# EAGLE board QwiicHUD_panel (EAGLE 7.7.0)
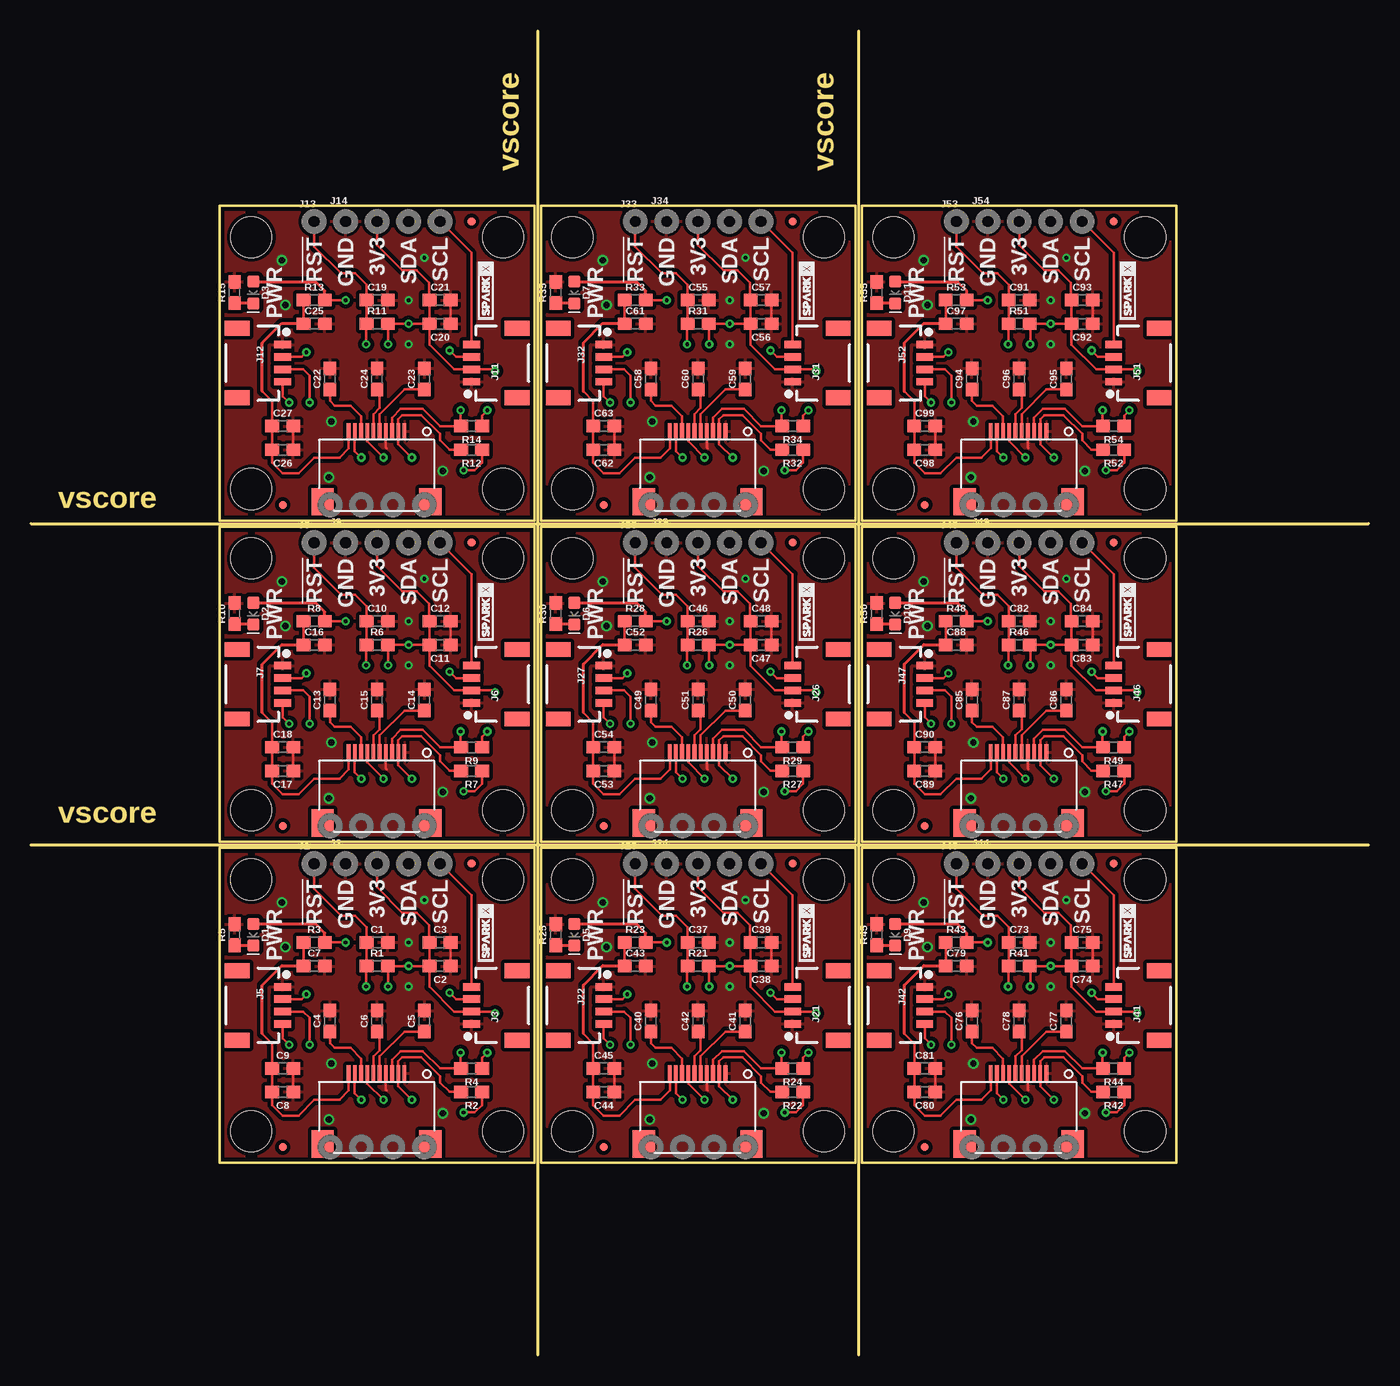
[diagram p0: board, top side]
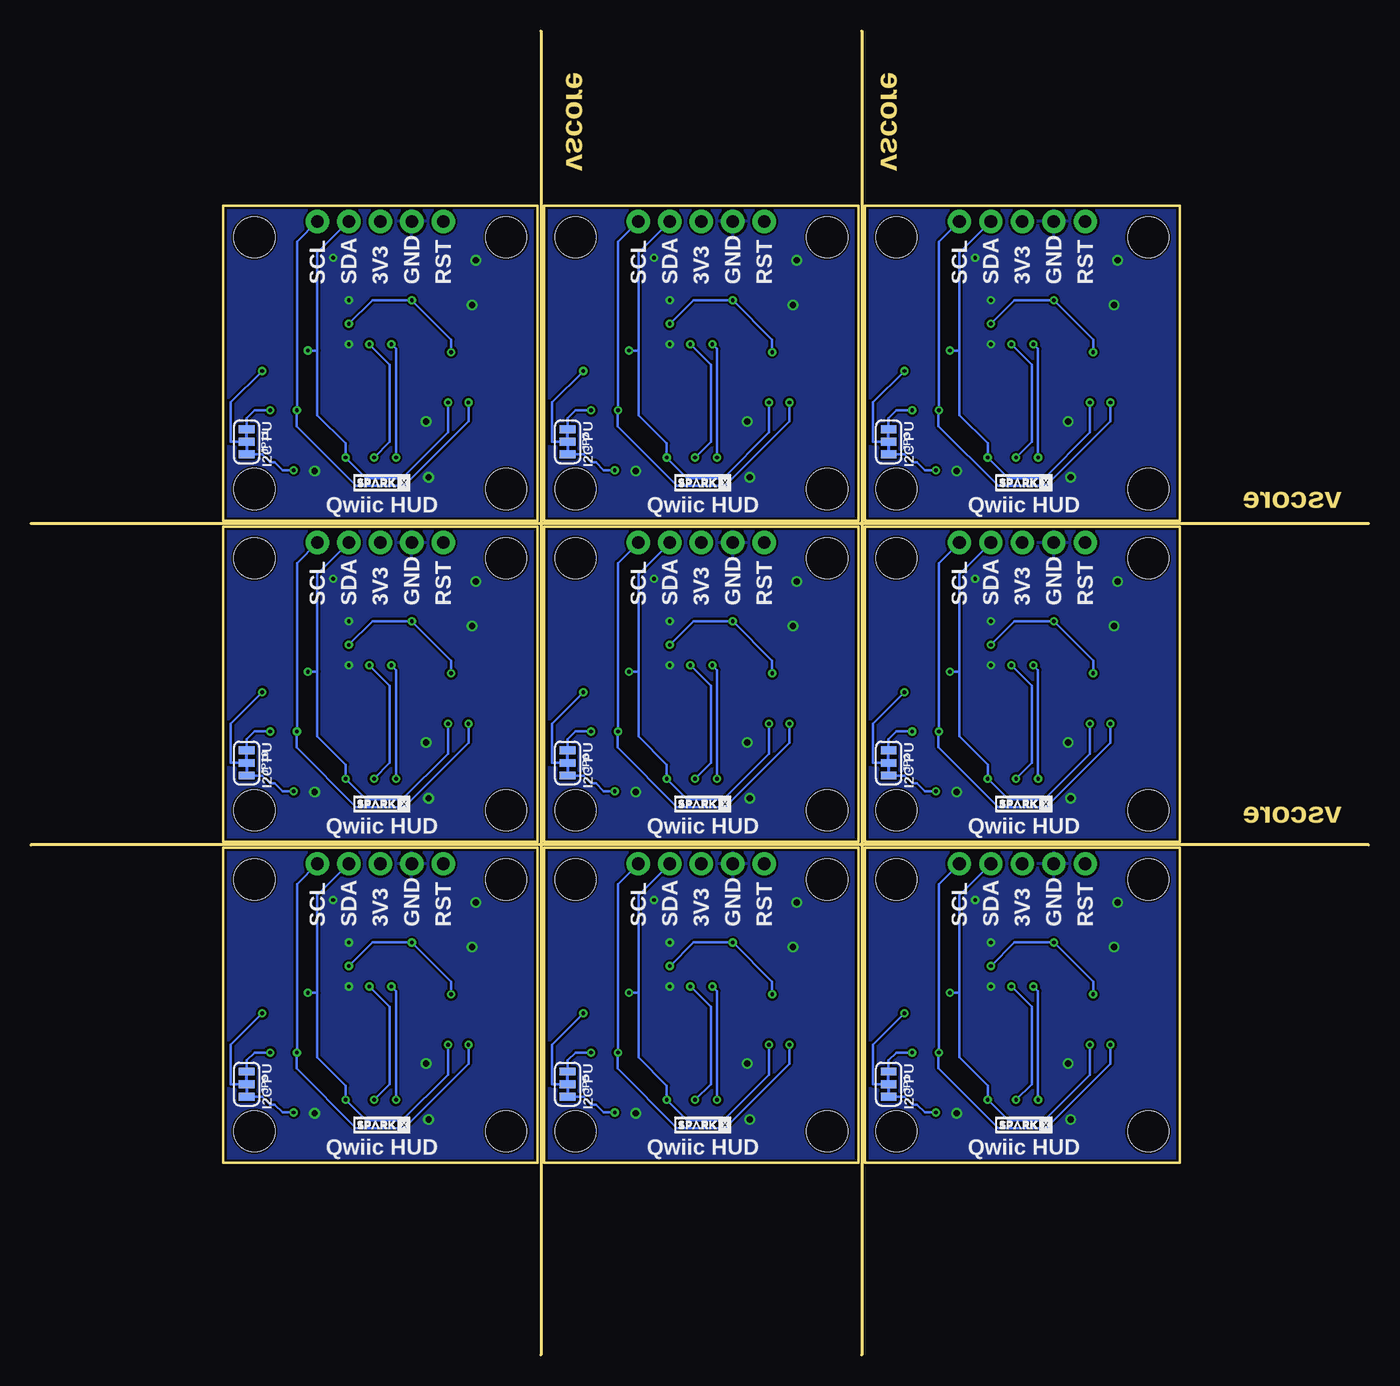
[diagram p1: board, bottom side, seen from below]

Size 107.95 x 106.81 mm. Coordinates in mm from the lower left corner, seen from the top.
Outline: 40.89,106.81 40.89,0
Outline: 66.8,106.81 66.8,0
Outline: 0,67.06 107.95,67.06
Outline: 0,41.15 107.95,41.15
Outline: 15.24,40.89 40.64,40.89 40.64,15.49 15.24,15.49 15.24,40.89
Outline: 15.24,66.8 40.64,66.8 40.64,41.4 15.24,41.4 15.24,66.8
Outline: 15.24,92.71 40.64,92.71 40.64,67.31 15.24,67.31 15.24,92.71
Outline: 41.15,40.89 66.55,40.89 66.55,15.49 41.15,15.49 41.15,40.89
Outline: 41.15,66.8 66.55,66.8 66.55,41.4 41.15,41.4 41.15,66.8
Outline: 41.15,92.71 66.55,92.71 66.55,67.31 41.15,67.31 41.15,92.71
Outline: 67.06,40.89 92.46,40.89 92.46,15.49 67.06,15.49 67.06,40.89
Outline: 67.06,66.8 92.46,66.8 92.46,41.4 67.06,41.4 67.06,66.8
Outline: 67.06,92.71 92.46,92.71 92.46,67.31 67.06,67.31 67.06,92.71
Copper layers (1*16): Top 0.035mm / dielectric 1.5mm / Bottom 0.035mm
Design rules "SparkFun-2-layer-TIGHT": minimum track width 7mil, minimum drill 15mil, track to track 7mil, track to pad 7mil, pad to pad 7mil, via to via 7mil, smd to smd 7mil, copper to edge 7mil, drill to drill 7mil, minimum pad ring 7mil, minimum via ring 7mil, stop-mask expansion 4mil, vias tented up to drill 25mil, thermal gap 10mil

## Footprints (pad centres in the part's own frame; a part is rotated, then mirrored left to right if it is on the bottom)
0603 = smd 1.1 x 1: 1 -0.85,0; 2 0.85,0
LED-0603 = smd 1 x 1: A -0.877,0; C 0.877,0
FIDUCIAL-MICRO = smd 0.635 x 0.635: 1 0,0
1X01_NO_SILK = drill 1.016 pad 1.88: 1 0,0
1X04_NO_SILK = drill 1.016 pad 1.88: 1 0,0; 2 2.54,0; 3 5.08,0; 4 7.62,0
1X04_1MM_RA = smd 0.6 x 1.35: 1 -1.5,0; 2 -0.5,0; 3 0.5,0; 4 1.5,0 | smd 1.2 x 2: NC1 2.8,-3.675; NC2 -2.8,-3.675
SERIES6288 = smd 0.3 x 1.3: 1 -2.3,3.4; 2 -1.8,3.4; 3 -1.3,3.4; 4 -0.8,3.4; 5 -0.3,3.4; 6 0.2,3.4; 7 0.7,3.4; 8 1.2,3.4; 9 1.7,3.4; 10 2.2,3.4 | smd 1.8 x 2.2: NC1 -4.4,-2.3; NC2 4.3,-2.3
SMT-JUMPER_3_2-NC_TRACE_SILK = smd 0.635 x 1.27: 1 -1.016,0; 2 0,0; 3 1.016,0
QWIIC_BOARD_MOUNT_HOLES = hole 3.302: -10.16,10.16; 10.16,10.16; 10.16,-10.16; -10.16,-10.16

## Placement (x,y rotation side)
C1  2.2uF  [0603]  27.94,33.27 0 top
C2  4.7uF  [0603]  33.02,31.37 180 top
C3  0.1uF  [0603]  33.02,33.27 0 top
C4  1.0uF  [0603]  24.13,26.92 90 top
C5  1.0uF  [0603]  31.75,26.92 90 top
C6  1.0uF  [0603]  27.94,26.92 90 top
C7  2.2uF  [0603]  22.86,31.37 0 top
C8  4.7uF  [0603]  20.32,21.21 180 top
C9  0.1uF  [0603]  20.32,23.11 0 top
C10  2.2uF  [0603]  27.94,59.18 0 top
C11  4.7uF  [0603]  33.02,57.28 180 top
C12  0.1uF  [0603]  33.02,59.18 0 top
C13  1.0uF  [0603]  24.13,52.83 90 top
C14  1.0uF  [0603]  31.75,52.83 90 top
C15  1.0uF  [0603]  27.94,52.83 90 top
C16  2.2uF  [0603]  22.86,57.28 0 top
C17  4.7uF  [0603]  20.32,47.12 180 top
C18  0.1uF  [0603]  20.32,49.02 0 top
C19  2.2uF  [0603]  27.94,85.09 0 top
C20  4.7uF  [0603]  33.02,83.19 180 top
C21  0.1uF  [0603]  33.02,85.09 0 top
C22  1.0uF  [0603]  24.13,78.74 90 top
C23  1.0uF  [0603]  31.75,78.74 90 top
C24  1.0uF  [0603]  27.94,78.74 90 top
C25  2.2uF  [0603]  22.86,83.19 0 top
C26  4.7uF  [0603]  20.32,73.03 180 top
C27  0.1uF  [0603]  20.32,74.93 0 top
C37  2.2uF  [0603]  53.85,33.27 0 top
C38  4.7uF  [0603]  58.93,31.37 180 top
C39  0.1uF  [0603]  58.93,33.27 0 top
C40  1.0uF  [0603]  50.04,26.92 90 top
C41  1.0uF  [0603]  57.66,26.92 90 top
C42  1.0uF  [0603]  53.85,26.92 90 top
C43  2.2uF  [0603]  48.77,31.37 0 top
C44  4.7uF  [0603]  46.23,21.21 180 top
C45  0.1uF  [0603]  46.23,23.11 0 top
C46  2.2uF  [0603]  53.85,59.18 0 top
C47  4.7uF  [0603]  58.93,57.28 180 top
C48  0.1uF  [0603]  58.93,59.18 0 top
C49  1.0uF  [0603]  50.04,52.83 90 top
C50  1.0uF  [0603]  57.66,52.83 90 top
C51  1.0uF  [0603]  53.85,52.83 90 top
C52  2.2uF  [0603]  48.77,57.28 0 top
C53  4.7uF  [0603]  46.23,47.12 180 top
C54  0.1uF  [0603]  46.23,49.02 0 top
C55  2.2uF  [0603]  53.85,85.09 0 top
C56  4.7uF  [0603]  58.93,83.19 180 top
C57  0.1uF  [0603]  58.93,85.09 0 top
C58  1.0uF  [0603]  50.04,78.74 90 top
C59  1.0uF  [0603]  57.66,78.74 90 top
C60  1.0uF  [0603]  53.85,78.74 90 top
C61  2.2uF  [0603]  48.77,83.19 0 top
C62  4.7uF  [0603]  46.23,73.03 180 top
C63  0.1uF  [0603]  46.23,74.93 0 top
C73  2.2uF  [0603]  79.76,33.27 0 top
C74  4.7uF  [0603]  84.84,31.37 180 top
C75  0.1uF  [0603]  84.84,33.27 0 top
C76  1.0uF  [0603]  75.95,26.92 90 top
C77  1.0uF  [0603]  83.57,26.92 90 top
C78  1.0uF  [0603]  79.76,26.92 90 top
C79  2.2uF  [0603]  74.68,31.37 0 top
C80  4.7uF  [0603]  72.14,21.21 180 top
C81  0.1uF  [0603]  72.14,23.11 0 top
C82  2.2uF  [0603]  79.76,59.18 0 top
C83  4.7uF  [0603]  84.84,57.28 180 top
C84  0.1uF  [0603]  84.84,59.18 0 top
C85  1.0uF  [0603]  75.95,52.83 90 top
C86  1.0uF  [0603]  83.57,52.83 90 top
C87  1.0uF  [0603]  79.76,52.83 90 top
C88  2.2uF  [0603]  74.68,57.28 0 top
C89  4.7uF  [0603]  72.14,47.12 180 top
C90  0.1uF  [0603]  72.14,49.02 0 top
C91  2.2uF  [0603]  79.76,85.09 0 top
C92  4.7uF  [0603]  84.84,83.19 180 top
C93  0.1uF  [0603]  84.84,85.09 0 top
C94  1.0uF  [0603]  75.95,78.74 90 top
C95  1.0uF  [0603]  83.57,78.74 90 top
C96  1.0uF  [0603]  79.76,78.74 90 top
C97  2.2uF  [0603]  74.68,83.19 0 top
C98  4.7uF  [0603]  72.14,73.03 180 top
C99  0.1uF  [0603]  72.14,74.93 0 top
D1  RED  [LED-0603]  17.94,33.89 270 top
D2  RED  [LED-0603]  17.94,59.8 270 top
D3  RED  [LED-0603]  17.94,85.71 270 top
D5  RED  [LED-0603]  43.85,33.89 270 top
D6  RED  [LED-0603]  43.85,59.8 270 top
D7  RED  [LED-0603]  43.85,85.71 270 top
D9  RED  [LED-0603]  69.76,33.89 270 top
D10  RED  [LED-0603]  69.76,59.8 270 top
D11  RED  [LED-0603]  69.76,85.71 270 top
FD1  FIDUCIALUFIDUCIAL  [FIDUCIAL-MICRO]  20.32,16.76 0 top
FD2  FIDUCIALUFIDUCIAL  [FIDUCIAL-MICRO]  35.56,39.62 0 top
FD3  FIDUCIALUFIDUCIAL  [FIDUCIAL-MICRO]  20.32,42.67 0 top
FD4  FIDUCIALUFIDUCIAL  [FIDUCIAL-MICRO]  35.56,65.53 0 top
FD5  FIDUCIALUFIDUCIAL  [FIDUCIAL-MICRO]  20.32,68.58 0 top
FD6  FIDUCIALUFIDUCIAL  [FIDUCIAL-MICRO]  35.56,91.44 0 top
FD9  FIDUCIALUFIDUCIAL  [FIDUCIAL-MICRO]  46.23,16.76 0 top
FD10  FIDUCIALUFIDUCIAL  [FIDUCIAL-MICRO]  61.47,39.62 0 top
FD11  FIDUCIALUFIDUCIAL  [FIDUCIAL-MICRO]  46.23,42.67 0 top
FD12  FIDUCIALUFIDUCIAL  [FIDUCIAL-MICRO]  61.47,65.53 0 top
FD13  FIDUCIALUFIDUCIAL  [FIDUCIAL-MICRO]  46.23,68.58 0 top
FD14  FIDUCIALUFIDUCIAL  [FIDUCIAL-MICRO]  61.47,91.44 0 top
FD17  FIDUCIALUFIDUCIAL  [FIDUCIAL-MICRO]  72.14,16.76 0 top
FD18  FIDUCIALUFIDUCIAL  [FIDUCIAL-MICRO]  87.38,39.62 0 top
FD19  FIDUCIALUFIDUCIAL  [FIDUCIAL-MICRO]  72.14,42.67 0 top
FD20  FIDUCIALUFIDUCIAL  [FIDUCIAL-MICRO]  87.38,65.53 0 top
FD21  FIDUCIALUFIDUCIAL  [FIDUCIAL-MICRO]  72.14,68.58 0 top
FD22  FIDUCIALUFIDUCIAL  [FIDUCIAL-MICRO]  87.38,91.44 0 top
J1  [1X01_NO_SILK]  22.86,39.62 0 top
J2  [1X04_NO_SILK]  25.4,39.62 0 top
J3  [1X04_1MM_RA]  35.56,28.19 90 top
J4  WISECHIP_HUD_FPC  [SERIES6288]  27.94,19.3 0 top
J5  [1X04_1MM_RA]  20.32,28.19 270 top
J6  [1X04_1MM_RA]  35.56,54.1 90 top
J7  [1X04_1MM_RA]  20.32,54.1 270 top
J8  [1X01_NO_SILK]  22.86,65.53 0 top
J9  [1X04_NO_SILK]  25.4,65.53 0 top
J10  WISECHIP_HUD_FPC  [SERIES6288]  27.94,45.21 0 top
J11  [1X04_1MM_RA]  35.56,80.01 90 top
J12  [1X04_1MM_RA]  20.32,80.01 270 top
J13  [1X01_NO_SILK]  22.86,91.44 0 top
J14  [1X04_NO_SILK]  25.4,91.44 0 top
J15  WISECHIP_HUD_FPC  [SERIES6288]  27.94,71.12 0 top
J21  [1X04_1MM_RA]  61.47,28.19 90 top
J22  [1X04_1MM_RA]  46.23,28.19 270 top
J23  [1X01_NO_SILK]  48.77,39.62 0 top
J24  [1X04_NO_SILK]  51.31,39.62 0 top
J25  WISECHIP_HUD_FPC  [SERIES6288]  53.85,19.3 0 top
J26  [1X04_1MM_RA]  61.47,54.1 90 top
J27  [1X04_1MM_RA]  46.23,54.1 270 top
J28  [1X01_NO_SILK]  48.77,65.53 0 top
J29  [1X04_NO_SILK]  51.31,65.53 0 top
J30  WISECHIP_HUD_FPC  [SERIES6288]  53.85,45.21 0 top
J31  [1X04_1MM_RA]  61.47,80.01 90 top
J32  [1X04_1MM_RA]  46.23,80.01 270 top
J33  [1X01_NO_SILK]  48.77,91.44 0 top
J34  [1X04_NO_SILK]  51.31,91.44 0 top
J35  WISECHIP_HUD_FPC  [SERIES6288]  53.85,71.12 0 top
J41  [1X04_1MM_RA]  87.38,28.19 90 top
J42  [1X04_1MM_RA]  72.14,28.19 270 top
J43  [1X01_NO_SILK]  74.68,39.62 0 top
J44  [1X04_NO_SILK]  77.22,39.62 0 top
J45  WISECHIP_HUD_FPC  [SERIES6288]  79.76,19.3 0 top
J46  [1X04_1MM_RA]  87.38,54.1 90 top
J47  [1X04_1MM_RA]  72.14,54.1 270 top
J48  [1X01_NO_SILK]  74.68,65.53 0 top
J49  [1X04_NO_SILK]  77.22,65.53 0 top
J50  WISECHIP_HUD_FPC  [SERIES6288]  79.76,45.21 0 top
J51  [1X04_1MM_RA]  87.38,80.01 90 top
J52  [1X04_1MM_RA]  72.14,80.01 270 top
J53  [1X01_NO_SILK]  74.68,91.44 0 top
J54  [1X04_NO_SILK]  77.22,91.44 0 top
J55  WISECHIP_HUD_FPC  [SERIES6288]  79.76,71.12 0 top
JP1  [SMT-JUMPER_3_2-NC_TRACE_SILK]  38.73,21.84 270 bottom
JP2  [SMT-JUMPER_3_2-NC_TRACE_SILK]  38.73,47.75 270 bottom
JP3  [SMT-JUMPER_3_2-NC_TRACE_SILK]  38.73,73.66 270 bottom
JP5  [SMT-JUMPER_3_2-NC_TRACE_SILK]  64.64,21.84 270 bottom
JP6  [SMT-JUMPER_3_2-NC_TRACE_SILK]  64.64,47.75 270 bottom
JP7  [SMT-JUMPER_3_2-NC_TRACE_SILK]  64.64,73.66 270 bottom
JP9  [SMT-JUMPER_3_2-NC_TRACE_SILK]  90.55,21.84 270 bottom
JP10  [SMT-JUMPER_3_2-NC_TRACE_SILK]  90.55,47.75 270 bottom
JP11  [SMT-JUMPER_3_2-NC_TRACE_SILK]  90.55,73.66 270 bottom
R1  10k  [0603]  27.94,31.37 0 top
R2  4.7k  [0603]  35.56,21.21 180 top
R3  8.2k  [0603]  22.86,33.27 0 top
R4  4.7k  [0603]  35.56,23.11 180 top
R5  1k  [0603]  16.44,33.89 90 top
R6  10k  [0603]  27.94,57.28 0 top
R7  4.7k  [0603]  35.56,47.12 180 top
R8  8.2k  [0603]  22.86,59.18 0 top
R9  4.7k  [0603]  35.56,49.02 180 top
R10  1k  [0603]  16.44,59.8 90 top
R11  10k  [0603]  27.94,83.19 0 top
R12  4.7k  [0603]  35.56,73.03 180 top
R13  8.2k  [0603]  22.86,85.09 0 top
R14  4.7k  [0603]  35.56,74.93 180 top
R15  1k  [0603]  16.44,85.71 90 top
R21  10k  [0603]  53.85,31.37 0 top
R22  4.7k  [0603]  61.47,21.21 180 top
R23  8.2k  [0603]  48.77,33.27 0 top
R24  4.7k  [0603]  61.47,23.11 180 top
R25  1k  [0603]  42.35,33.89 90 top
R26  10k  [0603]  53.85,57.28 0 top
R27  4.7k  [0603]  61.47,47.12 180 top
R28  8.2k  [0603]  48.77,59.18 0 top
R29  4.7k  [0603]  61.47,49.02 180 top
R30  1k  [0603]  42.35,59.8 90 top
R31  10k  [0603]  53.85,83.19 0 top
R32  4.7k  [0603]  61.47,73.03 180 top
R33  8.2k  [0603]  48.77,85.09 0 top
R34  4.7k  [0603]  61.47,74.93 180 top
R35  1k  [0603]  42.35,85.71 90 top
R41  10k  [0603]  79.76,31.37 0 top
R42  4.7k  [0603]  87.38,21.21 180 top
R43  8.2k  [0603]  74.68,33.27 0 top
R44  4.7k  [0603]  87.38,23.11 180 top
R45  1k  [0603]  68.26,33.89 90 top
R46  10k  [0603]  79.76,57.28 0 top
R47  4.7k  [0603]  87.38,47.12 180 top
R48  8.2k  [0603]  74.68,59.18 0 top
R49  4.7k  [0603]  87.38,49.02 180 top
R50  1k  [0603]  68.26,59.8 90 top
R51  10k  [0603]  79.76,83.19 0 top
R52  4.7k  [0603]  87.38,73.03 180 top
R53  8.2k  [0603]  74.68,85.09 0 top
R54  4.7k  [0603]  87.38,74.93 180 top
R55  1k  [0603]  68.26,85.71 90 top
U$1  QWIIC_BOARD_OUTLINEH  [QWIIC_BOARD_MOUNT_HOLES]  27.94,54.1 0 top
U$2  QWIIC_BOARD_OUTLINEH  [QWIIC_BOARD_MOUNT_HOLES]  27.94,28.19 0 top
U$3  [SPARKX-TINY]  36.7,34.04 90 top
U$4  [SPARKX-TINY]  27.81,18.54 0 bottom
U$5  [SPARKX-TINY]  36.7,59.94 90 top
U$6  [SPARKX-TINY]  27.81,44.45 0 bottom
U$7  QWIIC_BOARD_OUTLINEH  [QWIIC_BOARD_MOUNT_HOLES]  27.94,80.01 0 top
U$8  [SPARKX-TINY]  36.7,85.85 90 top
U$9  [SPARKX-TINY]  27.81,70.36 0 bottom
U$13  QWIIC_BOARD_OUTLINEH  [QWIIC_BOARD_MOUNT_HOLES]  53.85,28.19 0 top
U$14  [SPARKX-TINY]  62.61,34.04 90 top
U$15  [SPARKX-TINY]  53.72,18.54 0 bottom
U$16  QWIIC_BOARD_OUTLINEH  [QWIIC_BOARD_MOUNT_HOLES]  53.85,54.1 0 top
U$17  [SPARKX-TINY]  62.61,59.94 90 top
U$18  [SPARKX-TINY]  53.72,44.45 0 bottom
U$19  QWIIC_BOARD_OUTLINEH  [QWIIC_BOARD_MOUNT_HOLES]  53.85,80.01 0 top
U$20  [SPARKX-TINY]  62.61,85.85 90 top
U$21  [SPARKX-TINY]  53.72,70.36 0 bottom
U$25  QWIIC_BOARD_OUTLINEH  [QWIIC_BOARD_MOUNT_HOLES]  79.76,28.19 0 top
U$26  [SPARKX-TINY]  88.52,34.04 90 top
U$27  [SPARKX-TINY]  79.63,18.54 0 bottom
U$28  QWIIC_BOARD_OUTLINEH  [QWIIC_BOARD_MOUNT_HOLES]  79.76,54.1 0 top
U$29  [SPARKX-TINY]  88.52,59.94 90 top
U$30  [SPARKX-TINY]  79.63,44.45 0 bottom
U$31  QWIIC_BOARD_OUTLINEH  [QWIIC_BOARD_MOUNT_HOLES]  79.76,80.01 0 top
U$32  [SPARKX-TINY]  88.52,85.85 90 top
U$33  [SPARKX-TINY]  79.63,70.36 0 bottom

## Library data of the parts
C1 C7 C10 C16 C19 C25 C37 C43 C46 C52 C55 C61 C73 C79 C82 C88 C91 C97 = SparkFun-Capacitors; PROD_ID: CAP-07888
C2 C8 C11 C17 C20 C26 C38 C44 C47 C53 C56 C62 C74 C80 C83 C89 C92 C98 = SparkFun-Capacitors; PROD_ID: CAP-08280
C3 C9 C12 C18 C21 C27 C39 C45 C48 C54 C57 C63 C75 C81 C84 C90 C93 C99 = SparkFun-Capacitors; PROD_ID: CAP-08604
C4-C6 C13-C15 C22-C24 C40-C42 C49-C51 C58-C60 C76-C78 C85-C87 C94-C96 = SparkFun-Capacitors; PROD_ID: CAP-00868
D1-D3 D5-D7 D9-D11 = SparkFun-LED; PROD_ID: DIO-00819
FD1-FD6 FD9-FD14 FD17-FD22 = SparkFun-Aesthetics
J1 J8 J13 J23 J28 J33 J43 J48 J53 = SparkFun-Connectors
J2 J3 J5-J7 J9 J11 J12 J14 J21 J22 J24 J26 J27 J29 J31 J32 J34 J41 J42 J44 J46 J47 J49 J51 J52 J54 U$1-U$9 U$13-U$21 U$25-U$33 = SparkX
J4 J10 J15 J25 J30 J35 J45 J50 J55 = WiseChipHUD
JP1-JP3 JP5-JP7 JP9-JP11 = SparkFun-Jumpers
R1 R6 R11 R21 R26 R31 R41 R46 R51 = SparkFun-Resistors; PROD_ID: RES-00824
R2 R4 R7 R9 R12 R14 R22 R24 R27 R29 R32 R34 R42 R44 R47 R49 R52 R54 = SparkFun-Resistors; PROD_ID: RES-07857
R3 R8 R13 R23 R28 R33 R43 R48 R53 = SparkFun-Resistors; PROD_ID: RES-10646
R5 R10 R15 R25 R30 R35 R45 R50 R55 = SparkFun-Resistors; PROD_ID: RES-07856

## Nets
3.3V: C2.2 C3.1 D1.A J2.2 J3.2 J4.4 J5.2 JP1.2 R1.2 R3.2
3.3V1: C11.2 C12.1 D2.A J6.2 J7.2 J9.2 J10.4 JP2.2 R6.2 R8.2
3.3V2: C20.2 C21.1 D3.A J11.2 J12.2 J14.2 J15.4 JP3.2 R11.2 R13.2
3.3V4: C38.2 C39.1 D5.A J21.2 J22.2 J24.2 J25.4 JP5.2 R21.2 R23.2
3.3V5: C47.2 C48.1 D6.A J26.2 J27.2 J29.2 J30.4 JP6.2 R26.2 R28.2
3.3V6: C56.2 C57.1 D7.A J31.2 J32.2 J34.2 J35.4 JP7.2 R31.2 R33.2
3.3V8: C74.2 C75.1 D9.A J41.2 J42.2 J44.2 J45.4 JP9.2 R41.2 R43.2
3.3V9: C83.2 C84.1 D10.A J46.2 J47.2 J49.2 J50.4 JP10.2 R46.2 R48.2
3.3V10: C92.2 C93.1 D11.A J51.2 J52.2 J54.2 J55.4 JP11.2 R51.2 R53.2
GND: C1.2 C2.1 C3.2 C4.2 C5.2 C6.2 C7.2 C8.1 C9.2 J2.1 J3.1 J4.7 J4.10 J5.1 R5.2
GND1: C10.2 C11.1 C12.2 C13.2 C14.2 C15.2 C16.2 C17.1 C18.2 J6.1 J7.1 J9.1 J10.7 J10.10 R10.2
GND2: C19.2 C20.1 C21.2 C22.2 C23.2 C24.2 C25.2 C26.1 C27.2 J11.1 J12.1 J14.1 J15.7 J15.10 R15.2
GND4: C37.2 C38.1 C39.2 C40.2 C41.2 C42.2 C43.2 C44.1 C45.2 J21.1 J22.1 J24.1 J25.7 J25.10 R25.2
GND5: C46.2 C47.1 C48.2 C49.2 C50.2 C51.2 C52.2 C53.1 C54.2 J26.1 J27.1 J29.1 J30.7 J30.10 R30.2
GND6: C55.2 C56.1 C57.2 C58.2 C59.2 C60.2 C61.2 C62.1 C63.2 J31.1 J32.1 J34.1 J35.7 J35.10 R35.2
GND8: C73.2 C74.1 C75.2 C76.2 C77.2 C78.2 C79.2 C80.1 C81.2 J41.1 J42.1 J44.1 J45.7 J45.10 R45.2
GND9: C82.2 C83.1 C84.2 C85.2 C86.2 C87.2 C88.2 C89.1 C90.2 J46.1 J47.1 J49.1 J50.7 J50.10 R50.2
GND10: C91.2 C92.1 C93.2 C94.2 C95.2 C96.2 C97.2 C98.1 C99.2 J51.1 J52.1 J54.1 J55.7 J55.10 R55.2
IC1: C6.1 J4.5
IC2: C5.1 J4.6
IC3: C4.1 J4.3
IC4: C13.1 J10.3
IC5: C15.1 J10.5
IC6: C14.1 J10.6
IC7: C22.1 J15.3
IC8: C24.1 J15.5
IC9: C23.1 J15.6
IC13: C40.1 J25.3
IC14: C42.1 J25.5
IC15: C41.1 J25.6
IC16: C49.1 J30.3
IC17: C51.1 J30.5
IC18: C50.1 J30.6
IC19: C58.1 J35.3
IC20: C60.1 J35.5
IC21: C59.1 J35.6
IC25: C76.1 J45.3
IC26: C78.1 J45.5
IC27: C77.1 J45.6
IC28: C85.1 J50.3
IC29: C87.1 J50.5
IC30: C86.1 J50.6
IC31: C94.1 J55.3
IC32: C96.1 J55.5
IC33: C95.1 J55.6
N$1: JP1.3 R2.1
N$2: JP1.1 R4.1
N$3: D1.C R5.1
N$4: JP2.3 R7.1
N$5: JP2.1 R9.1
N$6: D2.C R10.1
N$7: JP3.3 R12.1
N$8: JP3.1 R14.1
N$9: D3.C R15.1
N$13: JP5.3 R22.1
N$14: JP5.1 R24.1
N$15: D5.C R25.1
N$16: JP6.3 R27.1
N$17: JP6.1 R29.1
N$18: D6.C R30.1
N$19: JP7.3 R32.1
N$20: JP7.1 R34.1
N$21: D7.C R35.1
N$25: JP9.3 R42.1
N$26: JP9.1 R44.1
N$27: D9.C R45.1
N$28: JP10.3 R47.1
N$29: JP10.1 R49.1
N$30: D10.C R50.1
N$31: JP11.3 R52.1
N$32: JP11.1 R54.1
N$33: D11.C R55.1
RST: C1.1 J1.1 J4.2 R1.1
RST1: C10.1 J8.1 J10.2 R6.1
RST2: C19.1 J13.1 J15.2 R11.1
RST4: C37.1 J23.1 J25.2 R21.1
RST5: C46.1 J28.1 J30.2 R26.1
RST6: C55.1 J33.1 J35.2 R31.1
RST8: C73.1 J43.1 J45.2 R41.1
RST9: C82.1 J48.1 J50.2 R46.1
RST10: C91.1 J53.1 J55.2 R51.1
SCL: J2.4 J3.4 J4.8 J5.4 R4.2
SCL1: J6.4 J7.4 J9.4 J10.8 R9.2
SCL2: J11.4 J12.4 J14.4 J15.8 R14.2
SCL4: J21.4 J22.4 J24.4 J25.8 R24.2
SCL5: J26.4 J27.4 J29.4 J30.8 R29.2
SCL6: J31.4 J32.4 J34.4 J35.8 R34.2
SCL8: J41.4 J42.4 J44.4 J45.8 R44.2
SCL9: J46.4 J47.4 J49.4 J50.8 R49.2
SCL10: J51.4 J52.4 J54.4 J55.8 R54.2
SDA: J2.3 J3.3 J4.9 J5.3 R2.2
SDA1: J6.3 J7.3 J9.3 J10.9 R7.2
SDA2: J11.3 J12.3 J14.3 J15.9 R12.2
SDA4: J21.3 J22.3 J24.3 J25.9 R22.2
SDA5: J26.3 J27.3 J29.3 J30.9 R27.2
SDA6: J31.3 J32.3 J34.3 J35.9 R32.2
SDA8: J41.3 J42.3 J44.3 J45.9 R42.2
SDA9: J46.3 J47.3 J49.3 J50.9 R47.2
SDA10: J51.3 J52.3 J54.3 J55.9 R52.2
VCC: C7.1 C8.2 C9.1 J4.1 R3.1
VCC1: C16.1 C17.2 C18.1 J10.1 R8.1
VCC2: C25.1 C26.2 C27.1 J15.1 R13.1
VCC4: C43.1 C44.2 C45.1 J25.1 R23.1
VCC5: C52.1 C53.2 C54.1 J30.1 R28.1
VCC6: C61.1 C62.2 C63.1 J35.1 R33.1
VCC8: C79.1 C80.2 C81.1 J45.1 R43.1
VCC9: C88.1 C89.2 C90.1 J50.1 R48.1
VCC10: C97.1 C98.2 C99.1 J55.1 R53.1

## Tracks (layer width: path | path; a pad name or v marks a point on that pad's centre or on a via)
3.3V  (via drill 0.3)
  Top 0.203: C2.2 C3.1 32.13,33.31 32.13,34.67 31.12,35.69 29.97,35.69 27.94,37.72 J2.2 | C2.2 32.17,29.68 34.16,27.69 J3.2 37.33,27.69 v37.47,27.56 | 28.64,31.22 R1.2 | J4.4 27.14,21.88 v28.45,20.57 | v28.83,29.72 28.83,31.33 R1.2 | J5.2 21.84,28.69 v22.23,29.08 | v25.4,33.27 R3.2 | R1.2 v30.48,31.37 C2.2
  Top 0.254: D1.A 22.96,34.77 23.71,34.02 R3.2
  Bottom 0.203: v37.47,27.56 40.01,25.02 40.01,21.84 JP1.2 | v28.45,20.57 27.18,21.84 27.18,28.07 v28.83,29.72 | v22.23,29.08 22.23,30.1 v25.4,33.27 28.58,33.27 v30.48,31.37
3.3V1  (via drill 0.3)
  Top 0.203: C11.2 C12.1 32.13,59.22 32.13,60.58 31.12,61.59 29.97,61.59 27.94,63.63 J9.2 | C11.2 32.17,55.59 34.16,53.6 J6.2 37.33,53.6 v37.47,53.47 | 28.64,57.13 R6.2 | J10.4 27.14,47.79 v28.45,46.48 | v28.83,55.63 28.83,57.24 R6.2 | J7.2 21.84,54.6 v22.23,54.99 | v25.4,59.18 R8.2 | R6.2 v30.48,57.28 C11.2
  Top 0.254: D2.A 22.96,60.68 23.71,59.93 R8.2
  Bottom 0.203: v37.47,53.47 40.01,50.93 40.01,47.75 JP2.2 | v28.45,46.48 27.18,47.75 27.18,53.98 v28.83,55.63 | v22.23,54.99 22.23,56.01 v25.4,59.18 28.58,59.18 v30.48,57.28
3.3V2  (via drill 0.3)
  Top 0.203: C20.2 C21.1 32.13,85.13 32.13,86.49 31.12,87.5 29.97,87.5 27.94,89.53 J14.2 | C20.2 32.17,81.5 34.16,79.51 J11.2 37.33,79.51 v37.47,79.38 | 28.64,83.03 R11.2 | J15.4 27.14,73.7 v28.45,72.39 | v28.83,81.53 28.83,83.15 R11.2 | J12.2 21.84,80.51 v22.23,80.9 | v25.4,85.09 R13.2 | R11.2 v30.48,83.19 C20.2
  Top 0.254: D3.A 22.96,86.59 23.71,85.84 R13.2
  Bottom 0.203: v37.47,79.38 40.01,76.84 40.01,73.66 JP3.2 | v28.45,72.39 27.18,73.66 27.18,79.88 v28.83,81.53 | v22.23,80.9 22.23,81.92 v25.4,85.09 28.58,85.09 v30.48,83.19
3.3V4  (via drill 0.3)
  Top 0.203: C38.2 C39.1 58.04,33.31 58.04,34.67 57.02,35.69 55.88,35.69 53.85,37.72 J24.2 | C38.2 58.08,29.68 60.06,27.69 J21.2 63.24,27.69 v63.37,27.56 | 54.55,31.22 R21.2 | J25.4 53.05,21.88 v54.36,20.57 | v54.74,29.72 54.74,31.33 R21.2 | J22.2 47.74,28.69 v48.13,29.08 | v51.31,33.27 R23.2 | R21.2 v56.39,31.37 C38.2
  Top 0.254: D5.A 48.87,34.77 49.62,34.02 R23.2
  Bottom 0.203: v63.37,27.56 65.91,25.02 65.91,21.84 JP5.2 | v54.36,20.57 53.09,21.84 53.09,28.07 v54.74,29.72 | v48.13,29.08 48.13,30.1 v51.31,33.27 54.48,33.27 v56.39,31.37
3.3V5  (via drill 0.3)
  Top 0.203: C47.2 C48.1 58.04,59.22 58.04,60.58 57.02,61.59 55.88,61.59 53.85,63.63 J29.2 | C47.2 58.08,55.59 60.06,53.6 J26.2 63.24,53.6 v63.37,53.47 | 54.55,57.13 R26.2 | J30.4 53.05,47.79 v54.36,46.48 | v54.74,55.63 54.74,57.24 R26.2 | J27.2 47.74,54.6 v48.13,54.99 | v51.31,59.18 R28.2 | R26.2 v56.39,57.28 C47.2
  Top 0.254: D6.A 48.87,60.68 49.62,59.93 R28.2
  Bottom 0.203: v63.37,53.47 65.91,50.93 65.91,47.75 JP6.2 | v54.36,46.48 53.09,47.75 53.09,53.98 v54.74,55.63 | v48.13,54.99 48.13,56.01 v51.31,59.18 54.48,59.18 v56.39,57.28
3.3V6  (via drill 0.3)
  Top 0.203: C56.2 C57.1 58.04,85.13 58.04,86.49 57.02,87.5 55.88,87.5 53.85,89.53 J34.2 | C56.2 58.08,81.5 60.06,79.51 J31.2 63.24,79.51 v63.37,79.38 | 54.55,83.03 R31.2 | J35.4 53.05,73.7 v54.36,72.39 | v54.74,81.53 54.74,83.15 R31.2 | J32.2 47.74,80.51 v48.13,80.9 | v51.31,85.09 R33.2 | R31.2 v56.39,83.19 C56.2
  Top 0.254: D7.A 48.87,86.59 49.62,85.84 R33.2
  Bottom 0.203: v63.37,79.38 65.91,76.84 65.91,73.66 JP7.2 | v54.36,72.39 53.09,73.66 53.09,79.88 v54.74,81.53 | v48.13,80.9 48.13,81.92 v51.31,85.09 54.48,85.09 v56.39,83.19
3.3V8  (via drill 0.3)
  Top 0.203: C74.2 C75.1 83.95,33.31 83.95,34.67 82.93,35.69 81.79,35.69 79.76,37.72 J44.2 | C74.2 83.99,29.68 85.97,27.69 J41.2 89.15,27.69 v89.28,27.56 | 80.46,31.22 R41.2 | J45.4 78.96,21.88 v80.26,20.57 | v80.64,29.72 80.64,31.33 R41.2 | J42.2 73.65,28.69 v74.04,29.08 | v77.22,33.27 R43.2 | R41.2 v82.3,31.37 C74.2
  Top 0.254: D9.A 74.78,34.77 75.53,34.02 R43.2
  Bottom 0.203: v89.28,27.56 91.82,25.02 91.82,21.84 JP9.2 | v80.26,20.57 78.99,21.84 78.99,28.07 v80.64,29.72 | v74.04,29.08 74.04,30.1 v77.22,33.27 80.39,33.27 v82.3,31.37
3.3V9  (via drill 0.3)
  Top 0.203: C83.2 C84.1 83.95,59.22 83.95,60.58 82.93,61.59 81.79,61.59 79.76,63.63 J49.2 | C83.2 83.99,55.59 85.97,53.6 J46.2 89.15,53.6 v89.28,53.47 | 80.46,57.13 R46.2 | J50.4 78.96,47.79 v80.26,46.48 | v80.64,55.63 80.64,57.24 R46.2 | J47.2 73.65,54.6 v74.04,54.99 | v77.22,59.18 R48.2 | R46.2 v82.3,57.28 C83.2
  Top 0.254: D10.A 74.78,60.68 75.53,59.93 R48.2
  Bottom 0.203: v89.28,53.47 91.82,50.93 91.82,47.75 JP10.2 | v80.26,46.48 78.99,47.75 78.99,53.98 v80.64,55.63 | v74.04,54.99 74.04,56.01 v77.22,59.18 80.39,59.18 v82.3,57.28
3.3V10  (via drill 0.3)
  Top 0.203: C92.2 C93.1 83.95,85.13 83.95,86.49 82.93,87.5 81.79,87.5 79.76,89.53 J54.2 | C92.2 83.99,81.5 85.97,79.51 J51.2 89.15,79.51 v89.28,79.38 | 80.46,83.03 R51.2 | J55.4 78.96,73.7 v80.26,72.39 | v80.64,81.53 80.64,83.15 R51.2 | J52.2 73.65,80.51 v74.04,80.9 | v77.22,85.09 R53.2 | R51.2 v82.3,83.19 C92.2
  Top 0.254: D11.A 74.78,86.59 75.53,85.84 R53.2
  Bottom 0.203: v89.28,79.38 91.82,76.84 91.82,73.66 JP11.2 | v80.26,72.39 78.99,73.66 78.99,79.88 v80.64,81.53 | v74.04,80.9 74.04,81.92 v77.22,85.09 80.39,85.09 v82.3,83.19
GND  (via drill 0.3, 0.51)
  Top 0.203: C8.1 C9.2 | C3.2 C2.1 | J4.7 28.64,21.4 28.7,21.34
  other vias: 31.75,36.7 30.48,33.27 30.48,29.72 20.24,36.49 20.54,32.89 24.24,23.49 24.04,18.99 33.24,19.49
  pour Bottom: 15.24,40.89 40.64,40.89 40.64,15.49 15.24,15.49
  pour Top (isolate 0.305): 15.24,40.89 40.64,40.89 40.64,15.49 15.24,15.49
GND1  (via drill 0.3, 0.51)
  Top 0.203: C17.1 C18.2 | C12.2 C11.1 | J10.7 28.64,47.31 28.7,47.24
  other vias: 31.75,62.61 30.48,59.18 30.48,55.63 20.24,62.4 20.54,58.8 24.24,49.4 24.04,44.9 33.24,45.4
  pour Bottom: 15.24,66.8 40.64,66.8 40.64,41.4 15.24,41.4
  pour Top (isolate 0.305): 15.24,66.8 40.64,66.8 40.64,41.4 15.24,41.4
GND2  (via drill 0.3, 0.51)
  Top 0.203: C26.1 C27.2 | C21.2 C20.1 | J15.7 28.64,73.21 28.7,73.15
  other vias: 31.75,88.52 30.48,85.09 30.48,81.53 20.24,88.31 20.54,84.71 24.24,75.31 24.04,70.81 33.24,71.31
  pour Bottom: 15.24,92.71 40.64,92.71 40.64,67.31 15.24,67.31
  pour Top (isolate 0.305): 15.24,92.71 40.64,92.71 40.64,67.31 15.24,67.31
GND4  (via drill 0.3, 0.51)
  Top 0.203: C44.1 C45.2 | C39.2 C38.1 | J25.7 54.55,21.4 54.61,21.34
  other vias: 57.66,36.7 56.39,33.27 56.39,29.72 46.15,36.49 46.45,32.89 50.15,23.49 49.95,18.99 59.15,19.49
  pour Bottom: 41.15,40.89 66.55,40.89 66.55,15.49 41.15,15.49
  pour Top (isolate 0.305): 41.15,40.89 66.55,40.89 66.55,15.49 41.15,15.49
GND5  (via drill 0.3, 0.51)
  Top 0.203: C53.1 C54.2 | C48.2 C47.1 | J30.7 54.55,47.31 54.61,47.24
  other vias: 57.66,62.61 56.39,59.18 56.39,55.63 46.15,62.4 46.45,58.8 50.15,49.4 49.95,44.9 59.15,45.4
  pour Bottom: 41.15,66.8 66.55,66.8 66.55,41.4 41.15,41.4
  pour Top (isolate 0.305): 41.15,66.8 66.55,66.8 66.55,41.4 41.15,41.4
GND6  (via drill 0.3, 0.51)
  Top 0.203: C62.1 C63.2 | C57.2 C56.1 | J35.7 54.55,73.21 54.61,73.15
  other vias: 57.66,88.52 56.39,85.09 56.39,81.53 46.15,88.31 46.45,84.71 50.15,75.31 49.95,70.81 59.15,71.31
  pour Bottom: 41.15,92.71 66.55,92.71 66.55,67.31 41.15,67.31
  pour Top (isolate 0.305): 41.15,92.71 66.55,92.71 66.55,67.31 41.15,67.31
GND8  (via drill 0.3, 0.51)
  Top 0.203: C80.1 C81.2 | C75.2 C74.1 | J45.7 80.46,21.4 80.52,21.34
  other vias: 83.57,36.7 82.3,33.27 82.3,29.72 72.06,36.49 72.36,32.89 76.06,23.49 75.86,18.99 85.06,19.49
  pour Bottom: 67.06,40.89 92.46,40.89 92.46,15.49 67.06,15.49
  pour Top (isolate 0.305): 67.06,40.89 92.46,40.89 92.46,15.49 67.06,15.49
GND9  (via drill 0.3, 0.51)
  Top 0.203: C89.1 C90.2 | C84.2 C83.1 | J50.7 80.46,47.31 80.52,47.24
  other vias: 83.57,62.61 82.3,59.18 82.3,55.63 72.06,62.4 72.36,58.8 76.06,49.4 75.86,44.9 85.06,45.4
  pour Bottom: 67.06,66.8 92.46,66.8 92.46,41.4 67.06,41.4
  pour Top (isolate 0.305): 67.06,66.8 92.46,66.8 92.46,41.4 67.06,41.4
GND10  (via drill 0.3, 0.51)
  Top 0.203: C98.1 C99.2 | C93.2 C92.1 | J55.7 80.46,73.21 80.52,73.15
  other vias: 83.57,88.52 82.3,85.09 82.3,81.53 72.06,88.31 72.36,84.71 76.06,75.31 75.86,70.81 85.06,71.31
  pour Bottom: 67.06,92.71 92.46,92.71 92.46,67.31 67.06,67.31
  pour Top (isolate 0.305): 67.06,92.71 92.46,92.71 92.46,67.31 67.06,67.31
IC1
  Top 0.203: C6.1 28.14,25.87 28.14,24.58 27.64,24.08 J4.5
IC2
  Top 0.203: C5.1 30.14,26.07 28.14,24.08 J4.6
IC3
  Top 0.203: C4.1 24.13,25.15 24.51,24.77 25.78,24.77 26.64,23.91 J4.3
IC4
  Top 0.203: C13.1 24.13,51.05 24.51,50.67 25.78,50.67 26.64,49.81 J10.3
IC5
  Top 0.203: C15.1 28.14,51.78 28.14,50.49 27.64,49.99 J10.5
IC6
  Top 0.203: C14.1 30.14,51.98 28.14,49.98 J10.6
IC7
  Top 0.203: C22.1 24.13,76.96 24.51,76.58 25.78,76.58 26.64,75.72 J15.3
IC8
  Top 0.203: C24.1 28.14,77.69 28.14,76.4 27.64,75.9 J15.5
IC9
  Top 0.203: C23.1 30.14,77.89 28.14,75.89 J15.6
IC13
  Top 0.203: C40.1 50.04,25.15 50.42,24.77 51.69,24.77 52.55,23.91 J25.3
IC14
  Top 0.203: C42.1 54.05,25.87 54.05,24.58 53.55,24.08 J25.5
IC15
  Top 0.203: C41.1 56.05,26.07 54.05,24.08 J25.6
IC16
  Top 0.203: C49.1 50.04,51.05 50.42,50.67 51.69,50.67 52.55,49.81 J30.3
IC17
  Top 0.203: C51.1 54.05,51.78 54.05,50.49 53.55,49.99 J30.5
IC18
  Top 0.203: C50.1 56.05,51.98 54.05,49.98 J30.6
IC19
  Top 0.203: C58.1 50.04,76.96 50.42,76.58 51.69,76.58 52.55,75.72 J35.3
IC20
  Top 0.203: C60.1 54.05,77.69 54.05,76.4 53.55,75.9 J35.5
IC21
  Top 0.203: C59.1 56.05,77.89 54.05,75.89 J35.6
IC25
  Top 0.203: C76.1 75.95,25.15 76.33,24.77 77.6,24.77 78.46,23.91 J45.3
IC26
  Top 0.203: C78.1 79.96,25.87 79.96,24.58 79.46,24.08 J45.5
IC27
  Top 0.203: C77.1 81.95,26.07 79.96,24.08 J45.6
IC28
  Top 0.203: C85.1 75.95,51.05 76.33,50.67 77.6,50.67 78.46,49.81 J50.3
IC29
  Top 0.203: C87.1 79.96,51.78 79.96,50.49 79.46,49.99 J50.5
IC30
  Top 0.203: C86.1 81.95,51.98 79.96,49.98 J50.6
IC31
  Top 0.203: C94.1 75.95,76.96 76.33,76.58 77.6,76.58 78.46,75.72 J55.3
IC32
  Top 0.203: C96.1 79.96,77.69 79.96,76.4 79.46,75.9 J55.5
IC33
  Top 0.203: C95.1 81.95,77.89 79.96,75.89 J55.6
N$1  (via drill 0.3)
  Top 0.203: R2.1 36.41,20.15 35.81,19.56 v34.92,19.56
  Bottom 0.203: v34.92,19.56 35.81,19.56 36.45,20.19 36.83,20.19 37.47,20.83 JP1.3
N$2  (via drill 0.3)
  Top 0.203: R4.1 36.41,23.96 v36.83,24.38
  Bottom 0.203: v36.83,24.38 38.1,24.38 38.73,23.75 JP1.1
N$3
  Top 0.254: 17.97,33.02 D1.C 16.47,33.02 R5.1
N$4  (via drill 0.3)
  Top 0.203: R7.1 36.41,46.06 35.81,45.47 v34.92,45.47
  Bottom 0.203: v34.92,45.47 35.81,45.47 36.45,46.1 36.83,46.1 37.47,46.74 JP2.3
N$5  (via drill 0.3)
  Top 0.203: R9.1 36.41,49.87 v36.83,50.29
  Bottom 0.203: v36.83,50.29 38.1,50.29 38.73,49.66 JP2.1
N$6
  Top 0.254: 17.97,58.92 D2.C 16.47,58.92 R10.1
N$7  (via drill 0.3)
  Top 0.203: R12.1 36.41,71.97 35.81,71.37 v34.92,71.37
  Bottom 0.203: v34.92,71.37 35.81,71.37 36.45,72.01 36.83,72.01 37.47,72.64 JP3.3
N$8  (via drill 0.3)
  Top 0.203: R14.1 36.41,75.78 v36.83,76.2
  Bottom 0.203: v36.83,76.2 38.1,76.2 38.73,75.56 JP3.1
N$9
  Top 0.254: 17.97,84.83 D3.C 16.47,84.83 R15.1
N$13  (via drill 0.3)
  Top 0.203: R22.1 62.32,20.15 61.72,19.56 v60.83,19.56
  Bottom 0.203: v60.83,19.56 61.72,19.56 62.36,20.19 62.74,20.19 63.37,20.83 JP5.3
N$14  (via drill 0.3)
  Top 0.203: R24.1 62.32,23.96 v62.74,24.38
  Bottom 0.203: v62.74,24.38 64.01,24.38 64.64,23.75 JP5.1
N$15
  Top 0.254: 43.88,33.02 D5.C 42.38,33.02 R25.1
N$16  (via drill 0.3)
  Top 0.203: R27.1 62.32,46.06 61.72,45.47 v60.83,45.47
  Bottom 0.203: v60.83,45.47 61.72,45.47 62.36,46.1 62.74,46.1 63.37,46.74 JP6.3
N$17  (via drill 0.3)
  Top 0.203: R29.1 62.32,49.87 v62.74,50.29
  Bottom 0.203: v62.74,50.29 64.01,50.29 64.64,49.66 JP6.1
N$18
  Top 0.254: 43.88,58.92 D6.C 42.38,58.92 R30.1
N$19  (via drill 0.3)
  Top 0.203: R32.1 62.32,71.97 61.72,71.37 v60.83,71.37
  Bottom 0.203: v60.83,71.37 61.72,71.37 62.36,72.01 62.74,72.01 63.37,72.64 JP7.3
N$20  (via drill 0.3)
  Top 0.203: R34.1 62.32,75.78 v62.74,76.2
  Bottom 0.203: v62.74,76.2 64.01,76.2 64.64,75.56 JP7.1
N$21
  Top 0.254: 43.88,84.83 D7.C 42.38,84.83 R35.1
N$25  (via drill 0.3)
  Top 0.203: R42.1 88.23,20.15 87.63,19.56 v86.74,19.56
  Bottom 0.203: v86.74,19.56 87.63,19.56 88.27,20.19 88.65,20.19 89.28,20.83 JP9.3
N$26  (via drill 0.3)
  Top 0.203: R44.1 88.23,23.96 v88.65,24.38
  Bottom 0.203: v88.65,24.38 89.92,24.38 90.55,23.75 JP9.1
N$27
  Top 0.254: 69.78,33.02 D9.C 68.28,33.02 R45.1
N$28  (via drill 0.3)
  Top 0.203: R47.1 88.23,46.06 87.63,45.47 v86.74,45.47
  Bottom 0.203: v86.74,45.47 87.63,45.47 88.27,46.1 88.65,46.1 89.28,46.74 JP10.3
N$29  (via drill 0.3)
  Top 0.203: R49.1 88.23,49.87 v88.65,50.29
  Bottom 0.203: v88.65,50.29 89.92,50.29 90.55,49.66 JP10.1
N$30
  Top 0.254: 69.78,58.92 D10.C 68.28,58.92 R50.1
N$31  (via drill 0.3)
  Top 0.203: R52.1 88.23,71.97 87.63,71.37 v86.74,71.37
  Bottom 0.203: v86.74,71.37 87.63,71.37 88.27,72.01 88.65,72.01 89.28,72.64 JP11.3
N$32  (via drill 0.3)
  Top 0.203: R54.1 88.23,75.78 v88.65,76.2
  Bottom 0.203: v88.65,76.2 89.92,76.2 90.55,75.56 JP11.1
N$33
  Top 0.254: 69.78,84.83 D11.C 68.28,84.83 R55.1
RST  (via drill 0.3)
  Top 0.203: J4.2 26.14,21.1 v26.67,20.57 | v27.05,29.72 27.05,31.33 R1.1 C1.1 27.09,34.5 26.16,35.43 25.02,35.43 22.86,37.59 J1.1
  Bottom 0.203: v26.67,20.57 26.67,29.34 v27.05,29.72
RST1  (via drill 0.3)
  Top 0.203: J10.2 26.14,47.01 v26.67,46.48 | v27.05,55.63 27.05,57.24 R6.1 C10.1 27.09,60.41 26.16,61.34 25.02,61.34 22.86,63.5 J8.1
  Bottom 0.203: v26.67,46.48 26.67,55.24 v27.05,55.63
RST2  (via drill 0.3)
  Top 0.203: J15.2 26.14,72.92 v26.67,72.39 | v27.05,81.53 27.05,83.15 R11.1 C19.1 27.09,86.32 26.16,87.25 25.02,87.25 22.86,89.41 J13.1
  Bottom 0.203: v26.67,72.39 26.67,81.15 v27.05,81.53
RST4  (via drill 0.3)
  Top 0.203: J25.2 52.05,21.1 v52.58,20.57 | v52.96,29.72 52.96,31.33 R21.1 C37.1 53,34.5 52.07,35.43 50.93,35.43 48.77,37.59 J23.1
  Bottom 0.203: v52.58,20.57 52.58,29.34 v52.96,29.72
RST5  (via drill 0.3)
  Top 0.203: J30.2 52.05,47.01 v52.58,46.48 | v52.96,55.63 52.96,57.24 R26.1 C46.1 53,60.41 52.07,61.34 50.93,61.34 48.77,63.5 J28.1
  Bottom 0.203: v52.58,46.48 52.58,55.24 v52.96,55.63
RST6  (via drill 0.3)
  Top 0.203: J35.2 52.05,72.92 v52.58,72.39 | v52.96,81.53 52.96,83.15 R31.1 C55.1 53,86.32 52.07,87.25 50.93,87.25 48.77,89.41 J33.1
  Bottom 0.203: v52.58,72.39 52.58,81.15 v52.96,81.53
RST8  (via drill 0.3)
  Top 0.203: J45.2 77.96,21.1 v78.49,20.57 | v78.87,29.72 78.87,31.33 R41.1 C73.1 78.91,34.5 77.98,35.43 76.83,35.43 74.68,37.59 J43.1
  Bottom 0.203: v78.49,20.57 78.49,29.34 v78.87,29.72
RST9  (via drill 0.3)
  Top 0.203: J50.2 77.96,47.01 v78.49,46.48 | v78.87,55.63 78.87,57.24 R46.1 C82.1 78.91,60.41 77.98,61.34 76.83,61.34 74.68,63.5 J48.1
  Bottom 0.203: v78.49,46.48 78.49,55.24 v78.87,55.63
RST10  (via drill 0.3)
  Top 0.203: J55.2 77.96,72.92 v78.49,72.39 | v78.87,81.53 78.87,83.15 R51.1 C91.1 78.91,86.32 77.98,87.25 76.83,87.25 74.68,89.41 J53.1
  Bottom 0.203: v78.49,72.39 78.49,81.15 v78.87,81.53
SCL  (via drill 0.3)
  Top 0.203: R4.2 34.67,23.11 | J4.8 29.14,23.81 29.84,24.51 31.62,24.51 33.02,23.11 34.67,23.11 | 34.67,23.11 v34.67,24.38 | J3.4 35.56,37.08 J2.4 | J5.4 20.32,25.53 v20.83,25.02
  Bottom 0.203: J2.4 34.67,37.97 v34.67,24.38 34.71,24.34 R4.2 29.88,18.29 26.04,18.29 20.83,23.49 v20.83,25.02
SCL1  (via drill 0.3)
  Top 0.203: R9.2 34.67,49.02 | J10.8 29.14,49.71 29.84,50.42 31.62,50.42 33.02,49.02 34.67,49.02 | 34.67,49.02 v34.67,50.29 | J6.4 35.56,62.99 J9.4 | J7.4 20.32,51.44 v20.83,50.93
  Bottom 0.203: J9.4 34.67,63.88 v34.67,50.29 34.71,50.25 R9.2 29.88,44.2 26.04,44.2 20.83,49.4 v20.83,50.93
SCL2  (via drill 0.3)
  Top 0.203: R14.2 34.67,74.93 | J15.8 29.14,75.62 29.84,76.33 31.62,76.33 33.02,74.93 34.67,74.93 | 34.67,74.93 v34.67,76.2 | J11.4 35.56,88.9 J14.4 | J12.4 20.32,77.34 v20.83,76.84
  Bottom 0.203: J14.4 34.67,89.79 v34.67,76.2 34.71,76.16 R14.2 29.88,70.1 26.04,70.1 20.83,75.31 v20.83,76.84
SCL4  (via drill 0.3)
  Top 0.203: R24.2 60.58,23.11 | J25.8 55.05,23.81 55.75,24.51 57.53,24.51 58.93,23.11 60.58,23.11 | 60.58,23.11 v60.58,24.38 | J21.4 61.47,37.08 J24.4 | J22.4 46.23,25.53 v46.74,25.02
  Bottom 0.203: J24.4 60.58,37.97 v60.58,24.38 60.62,24.34 R24.2 55.79,18.29 51.94,18.29 46.74,23.49 v46.74,25.02
SCL5  (via drill 0.3)
  Top 0.203: R29.2 60.58,49.02 | J30.8 55.05,49.71 55.75,50.42 57.53,50.42 58.93,49.02 60.58,49.02 | 60.58,49.02 v60.58,50.29 | J26.4 61.47,62.99 J29.4 | J27.4 46.23,51.44 v46.74,50.93
  Bottom 0.203: J29.4 60.58,63.88 v60.58,50.29 60.62,50.25 R29.2 55.79,44.2 51.94,44.2 46.74,49.4 v46.74,50.93
SCL6  (via drill 0.3)
  Top 0.203: R34.2 60.58,74.93 | J35.8 55.05,75.62 55.75,76.33 57.53,76.33 58.93,74.93 60.58,74.93 | 60.58,74.93 v60.58,76.2 | J31.4 61.47,88.9 J34.4 | J32.4 46.23,77.34 v46.74,76.84
  Bottom 0.203: J34.4 60.58,89.79 v60.58,76.2 60.62,76.16 R34.2 55.79,70.1 51.94,70.1 46.74,75.31 v46.74,76.84
SCL8  (via drill 0.3)
  Top 0.203: R44.2 86.49,23.11 | J45.8 80.96,23.81 81.66,24.51 83.44,24.51 84.84,23.11 86.49,23.11 | 86.49,23.11 v86.49,24.38 | J41.4 87.38,37.08 J44.4 | J42.4 72.14,25.53 v72.64,25.02
  Bottom 0.203: J44.4 86.49,37.97 v86.49,24.38 86.53,24.34 R44.2 81.7,18.29 77.85,18.29 72.64,23.49 v72.64,25.02
SCL9  (via drill 0.3)
  Top 0.203: R49.2 86.49,49.02 | J50.8 80.96,49.71 81.66,50.42 83.44,50.42 84.84,49.02 86.49,49.02 | 86.49,49.02 v86.49,50.29 | J46.4 87.38,62.99 J49.4 | J47.4 72.14,51.44 v72.64,50.93
  Bottom 0.203: J49.4 86.49,63.88 v86.49,50.29 86.53,50.25 R49.2 81.7,44.2 77.85,44.2 72.64,49.4 v72.64,50.93
SCL10  (via drill 0.3)
  Top 0.203: R54.2 86.49,74.93 | J55.8 80.96,75.62 81.66,76.33 83.44,76.33 84.84,74.93 86.49,74.93 | 86.49,74.93 v86.49,76.2 | J51.4 87.38,88.9 J54.4 | J52.4 72.14,77.34 v72.64,76.84
  Bottom 0.203: J54.4 86.49,89.79 v86.49,76.2 86.53,76.16 R54.2 81.7,70.1 77.85,70.1 72.64,75.31 v72.64,76.84
SDA  (via drill 0.3)
  Top 0.203: R2.2 33.78,21.21 33.02,21.97 33.02,22.48 31.5,24 29.97,24 29.64,23.67 J4.9 29.64,21.67 v30.73,20.57 | J3.3 34.3,28.69 v33.78,29.21 | J5.3 21.96,27.69 22.48,27.18 v22.48,25.02
  Bottom 0.203: 33.02,29.21 33.02,24 30.73,21.72 v30.73,20.57 29.08,18.92 26.16,18.92 22.48,22.61 v22.48,25.02 | 33.02,29.21 33.02,37.08 J2.3 | v33.78,29.21 33.02,29.21
SDA1  (via drill 0.3)
  Top 0.203: R7.2 33.78,47.12 33.02,47.88 33.02,48.39 31.5,49.91 29.97,49.91 29.64,49.58 J10.9 29.64,47.58 v30.73,46.48 | J6.3 34.3,54.6 v33.78,55.12 | J7.3 21.96,53.6 22.48,53.09 v22.48,50.93
  Bottom 0.203: 33.02,55.12 33.02,49.91 30.73,47.62 v30.73,46.48 29.08,44.83 26.16,44.83 22.48,48.51 v22.48,50.93 | 33.02,55.12 33.02,62.99 J9.3 | v33.78,55.12 33.02,55.12
SDA2  (via drill 0.3)
  Top 0.203: R12.2 33.78,73.03 33.02,73.79 33.02,74.3 31.5,75.82 29.97,75.82 29.64,75.49 J15.9 29.64,73.48 v30.73,72.39 | J11.3 34.3,80.51 v33.78,81.03 | J12.3 21.96,79.51 22.48,78.99 v22.48,76.84
  Bottom 0.203: 33.02,81.03 33.02,75.82 30.73,73.53 v30.73,72.39 29.08,70.74 26.16,70.74 22.48,74.42 v22.48,76.84 | 33.02,81.03 33.02,88.9 J14.3 | v33.78,81.03 33.02,81.03
SDA4  (via drill 0.3)
  Top 0.203: R22.2 59.69,21.21 58.93,21.97 58.93,22.48 57.4,24 55.88,24 55.55,23.67 J25.9 55.55,21.67 v56.64,20.57 | J21.3 60.21,28.69 v59.69,29.21 | J22.3 47.87,27.69 48.39,27.18 v48.39,25.02
  Bottom 0.203: 58.93,29.21 58.93,24 56.64,21.72 v56.64,20.57 54.99,18.92 52.07,18.92 48.39,22.61 v48.39,25.02 | 58.93,29.21 58.93,37.08 J24.3 | v59.69,29.21 58.93,29.21
SDA5  (via drill 0.3)
  Top 0.203: R27.2 59.69,47.12 58.93,47.88 58.93,48.39 57.4,49.91 55.88,49.91 55.55,49.58 J30.9 55.55,47.58 v56.64,46.48 | J26.3 60.21,54.6 v59.69,55.12 | J27.3 47.87,53.6 48.39,53.09 v48.39,50.93
  Bottom 0.203: 58.93,55.12 58.93,49.91 56.64,47.62 v56.64,46.48 54.99,44.83 52.07,44.83 48.39,48.51 v48.39,50.93 | 58.93,55.12 58.93,62.99 J29.3 | v59.69,55.12 58.93,55.12
SDA6  (via drill 0.3)
  Top 0.203: R32.2 59.69,73.03 58.93,73.79 58.93,74.3 57.4,75.82 55.88,75.82 55.55,75.49 J35.9 55.55,73.48 v56.64,72.39 | J31.3 60.21,80.51 v59.69,81.03 | J32.3 47.87,79.51 48.39,78.99 v48.39,76.84
  Bottom 0.203: 58.93,81.03 58.93,75.82 56.64,73.53 v56.64,72.39 54.99,70.74 52.07,70.74 48.39,74.42 v48.39,76.84 | 58.93,81.03 58.93,88.9 J34.3 | v59.69,81.03 58.93,81.03
SDA8  (via drill 0.3)
  Top 0.203: R42.2 85.6,21.21 84.84,21.97 84.84,22.48 83.31,24 81.79,24 81.46,23.67 J45.9 81.46,21.67 v82.55,20.57 | J41.3 86.11,28.69 v85.6,29.21 | J42.3 73.78,27.69 74.3,27.18 v74.3,25.02
  Bottom 0.203: 84.84,29.21 84.84,24 82.55,21.72 v82.55,20.57 80.9,18.92 77.98,18.92 74.3,22.61 v74.3,25.02 | 84.84,29.21 84.84,37.08 J44.3 | v85.6,29.21 84.84,29.21
SDA9  (via drill 0.3)
  Top 0.203: R47.2 85.6,47.12 84.84,47.88 84.84,48.39 83.31,49.91 81.79,49.91 81.46,49.58 J50.9 81.46,47.58 v82.55,46.48 | J46.3 86.11,54.6 v85.6,55.12 | J47.3 73.78,53.6 74.3,53.09 v74.3,50.93
  Bottom 0.203: 84.84,55.12 84.84,49.91 82.55,47.62 v82.55,46.48 80.9,44.83 77.98,44.83 74.3,48.51 v74.3,50.93 | 84.84,55.12 84.84,62.99 J49.3 | v85.6,55.12 84.84,55.12
SDA10  (via drill 0.3)
  Top 0.203: R52.2 85.6,73.03 84.84,73.79 84.84,74.3 83.31,75.82 81.79,75.82 81.46,75.49 J55.9 81.46,73.48 v82.55,72.39 | J51.3 86.11,80.51 v85.6,81.03 | J52.3 73.78,79.51 74.3,78.99 v74.3,76.84
  Bottom 0.203: 84.84,81.03 84.84,75.82 82.55,73.53 v82.55,72.39 80.9,70.74 77.98,70.74 74.3,74.42 v74.3,76.84 | 84.84,81.03 84.84,88.9 J54.3 | v85.6,81.03 84.84,81.03
VCC
  Top 0.203: C8.2 C9.1 | R3.1 C7.1 | C9.1 19.47,20.15 20.32,19.3 21.59,19.3 22.86,20.57 24.89,20.57 25.65,21.34 25.65,22.69 J4.1 | C9.1 19.47,25.11 18.67,25.91
  Top 0.254: 18.67,25.91 18.67,29.82 20.24,31.39 21.98,31.39 C7.1
VCC1
  Top 0.203: C17.2 C18.1 | R8.1 C16.1 | C18.1 19.47,46.06 20.32,45.21 21.59,45.21 22.86,46.48 24.89,46.48 25.65,47.24 25.65,48.6 J10.1 | C18.1 19.47,51.02 18.67,51.82
  Top 0.254: 18.67,51.82 18.67,55.73 20.24,57.3 21.98,57.3 C16.1
VCC2
  Top 0.203: C26.2 C27.1 | R13.1 C25.1 | C27.1 19.47,71.97 20.32,71.12 21.59,71.12 22.86,72.39 24.89,72.39 25.65,73.15 25.65,74.51 J15.1 | C27.1 19.47,76.92 18.67,77.72
  Top 0.254: 18.67,77.72 18.67,81.64 20.24,83.21 21.98,83.21 C25.1
VCC4
  Top 0.203: C44.2 C45.1 | R23.1 C43.1 | C45.1 45.38,20.15 46.23,19.3 47.5,19.3 48.77,20.57 50.8,20.57 51.56,21.34 51.56,22.69 J25.1 | C45.1 45.38,25.11 44.58,25.91
  Top 0.254: 44.58,25.91 44.58,29.82 46.15,31.39 47.89,31.39 C43.1
VCC5
  Top 0.203: C53.2 C54.1 | R28.1 C52.1 | C54.1 45.38,46.06 46.23,45.21 47.5,45.21 48.77,46.48 50.8,46.48 51.56,47.24 51.56,48.6 J30.1 | C54.1 45.38,51.02 44.58,51.82
  Top 0.254: 44.58,51.82 44.58,55.73 46.15,57.3 47.89,57.3 C52.1
VCC6
  Top 0.203: C62.2 C63.1 | R33.1 C61.1 | C63.1 45.38,71.97 46.23,71.12 47.5,71.12 48.77,72.39 50.8,72.39 51.56,73.15 51.56,74.51 J35.1 | C63.1 45.38,76.92 44.58,77.72
  Top 0.254: 44.58,77.72 44.58,81.64 46.15,83.21 47.89,83.21 C61.1
VCC8
  Top 0.203: C80.2 C81.1 | R43.1 C79.1 | C81.1 71.29,20.15 72.14,19.3 73.41,19.3 74.68,20.57 76.71,20.57 77.47,21.34 77.47,22.69 J45.1 | C81.1 71.29,25.11 70.48,25.91
  Top 0.254: 70.48,25.91 70.48,29.82 72.06,31.39 73.8,31.39 C79.1
VCC9
  Top 0.203: C89.2 C90.1 | R48.1 C88.1 | C90.1 71.29,46.06 72.14,45.21 73.41,45.21 74.68,46.48 76.71,46.48 77.47,47.24 77.47,48.6 J50.1 | C90.1 71.29,51.02 70.48,51.82
  Top 0.254: 70.48,51.82 70.48,55.73 72.06,57.3 73.8,57.3 C88.1
VCC10
  Top 0.203: C98.2 C99.1 | R53.1 C97.1 | C99.1 71.29,71.97 72.14,71.12 73.41,71.12 74.68,72.39 76.71,72.39 77.47,73.15 77.47,74.51 J55.1 | C99.1 71.29,76.92 70.48,77.72
  Top 0.254: 70.48,77.72 70.48,81.64 72.06,83.21 73.8,83.21 C97.1

## Text on the board
Dimension: vscore | vscore | vscore | vscore
tPlace: !RST | GND | 3V3 | SDA | SCL | !RST | GND | 3V3 | SDA | SCL | !RST | GND | 3V3 | SDA | SCL | PWR | PWR | PWR | !RST | GND | 3V3 | SDA | SCL | !RST | GND | 3V3 | SDA | SCL | !RST | GND | 3V3 | SDA | SCL | PWR | PWR | PWR | !RST | GND | 3V3 | SDA | SCL | !RST | GND | 3V3 | SDA | SCL | !RST | GND | 3V3 | SDA | SCL | PWR | PWR | PWR
bPlace: RST | GND | 3V3 | SDA | SCL | RST | GND | 3V3 | SDA | SCL | RST | GND | 3V3 | SDA | SCL | I2C PU | I2C PU | I2C PU | Qwiic HUD | Qwiic HUD | Qwiic HUD | RST | GND | 3V3 | SDA | SCL | RST | GND | 3V3 | SDA | SCL | RST | GND | 3V3 | SDA | SCL | I2C PU | I2C PU | I2C PU | Qwiic HUD | Qwiic HUD | Qwiic HUD | RST | GND | 3V3 | SDA | SCL | RST | GND | 3V3 | SDA | SCL | RST | GND | 3V3 | SDA | SCL | I2C PU | I2C PU | I2C PU | Qwiic HUD | Qwiic HUD | Qwiic HUD